# Altium PCB CH9343-安卓USB转串口板V0.0.1版本.PcbDoc
Units mil, origin at the board's own origin, x right, y up, seen from the top; angles counter-clockwise.
Board outline 1574.8 x 787.4 mil, 2 copper layers (Top Layer, Bottom Layer); 27 components, 20 nets, 88 pads, 23 vias.
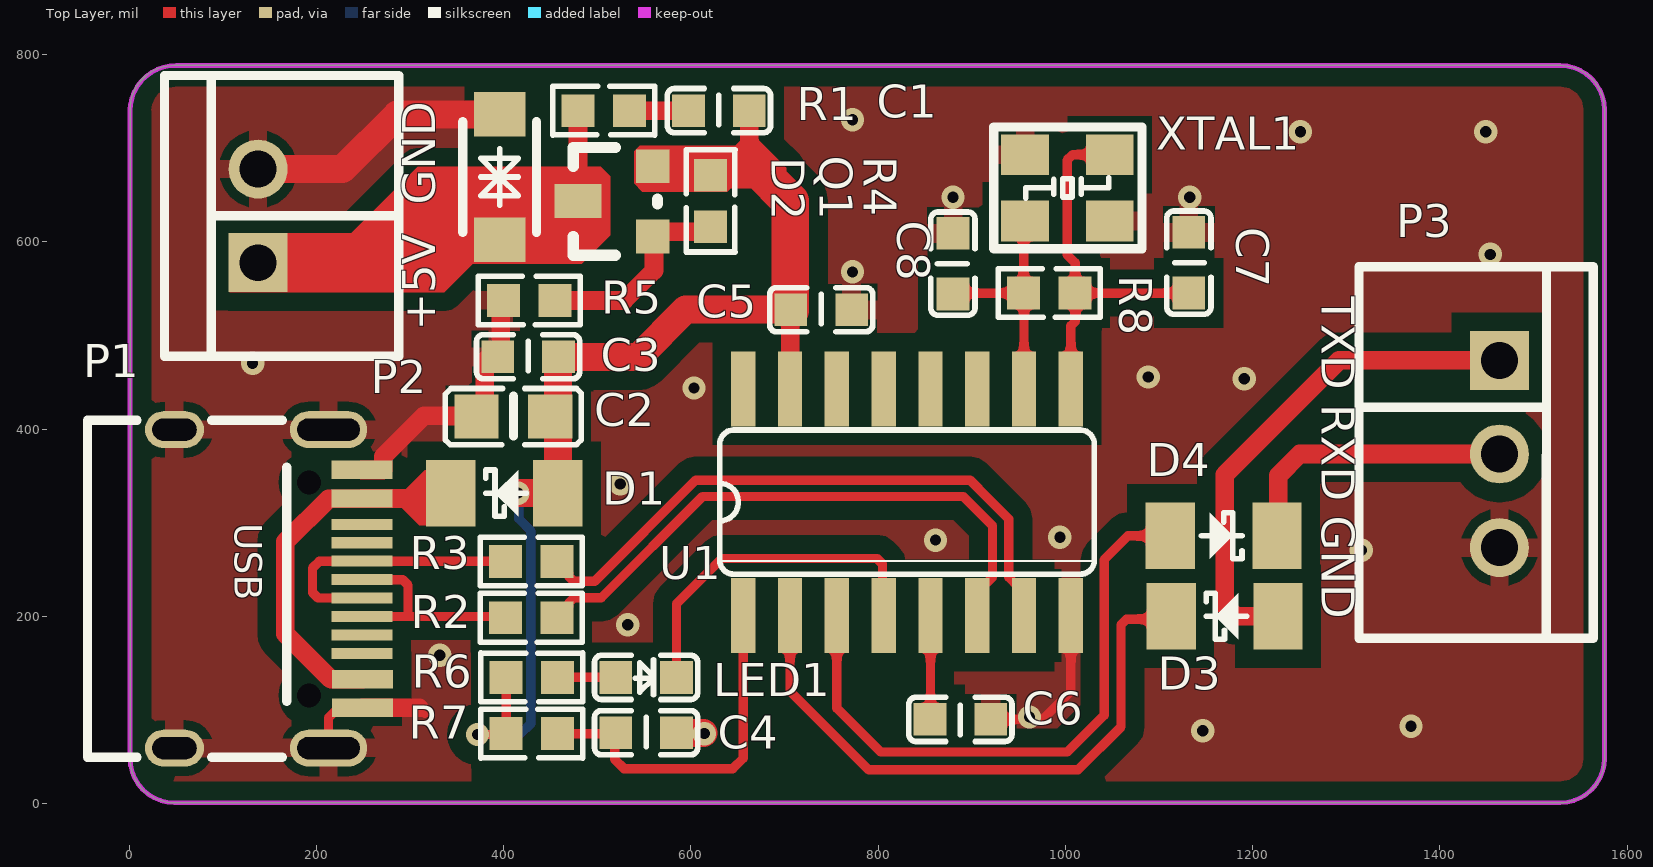
[diagram p0: Top Layer view]
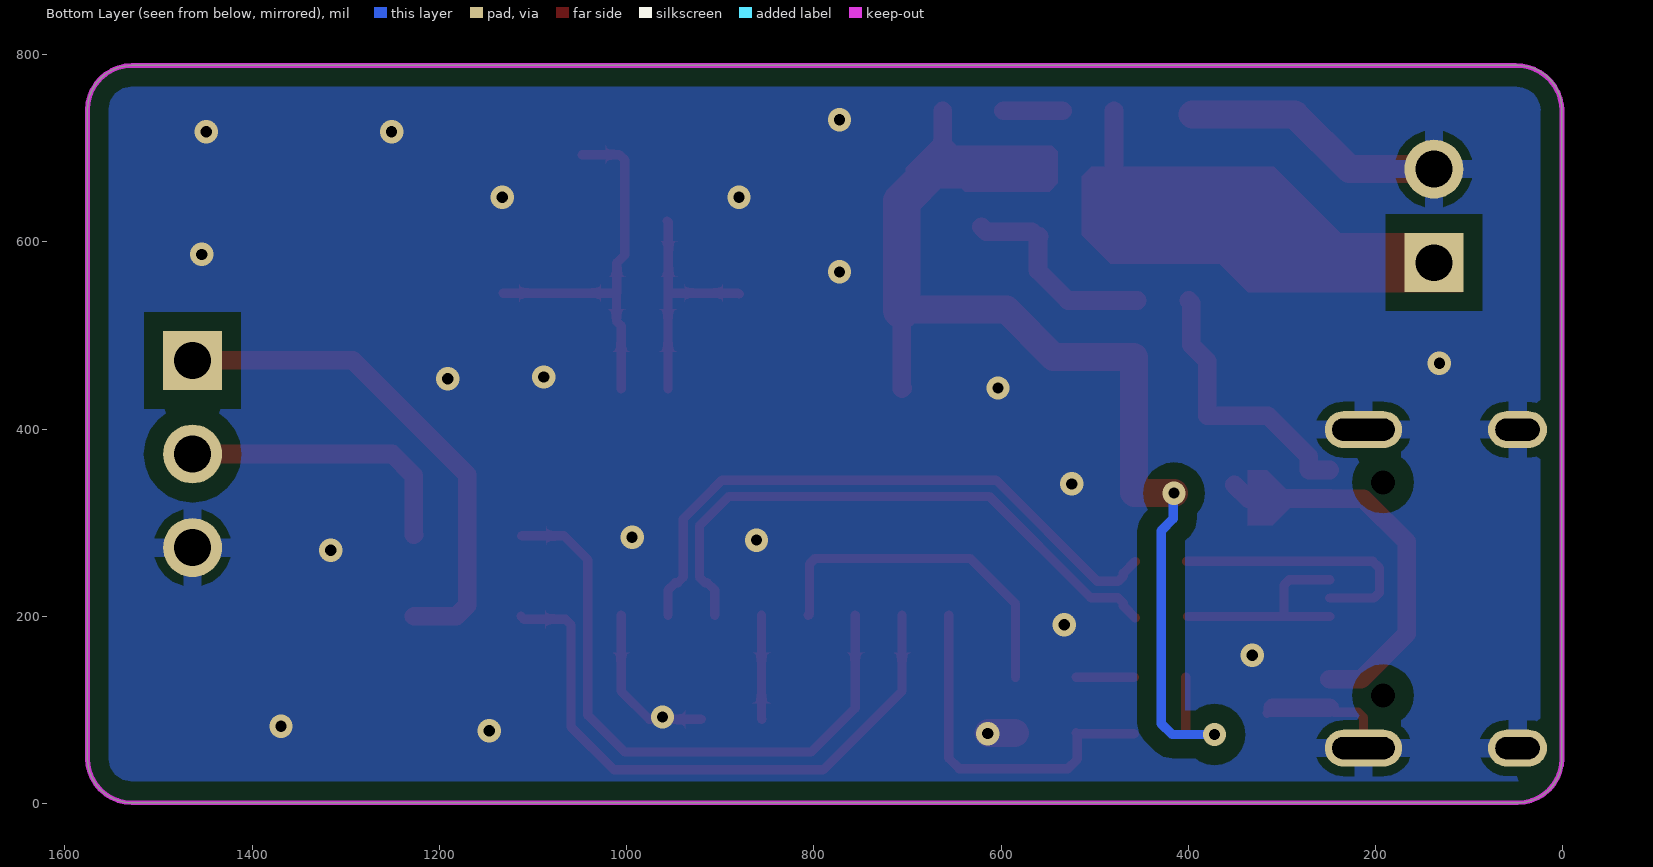
[diagram p1: Bottom Layer view, seen from below]

## Layer stack, top to bottom
Top Solder: solder mask 0.4, Solder Resist, Dk 3.5
Top Layer: signal copper 1.4
Dielectric 1: dielectric 12.6, FR-4, Dk 4.8
Bottom Layer: signal copper 1.4
Bottom Solder: solder mask 0.4, Solder Resist, Dk 3.5

## Board outline
0.98,48.23 0.98,741.14 cw(c48.23,741.14) 48.23,788.39 1528.54,788.39 cw(c1528.54,741.14) 1575.79,741.14 1575.79,48.23 cw(c1528.54,48.23) 1528.54,0.98 48.23,0.98 cw(c48.23,48.23)

## Design rules (kind name [scope] priority, off if disabled: settings)
Clearance Clearance_1 [InPolygon] p1: gap=20 ignorepadtopadclearanceinfootprint=FALSE
Clearance [All] p2: gap=4 ignorepadtopadclearanceinfootprint=FALSE
ComponentClearance [All] p1: gap=1 collisioncheckmode=3 verticalgap=1 showdistances=FALSE
DiffPairsRouting [All] p1: maxlimit=10 minlimit=7.5 mostfreqgap=10 toplayer_minwidth=10 toplayer_maxwidth=15 toplayer_prefwidth=15 bottomlayer_minwidth=10 bottomlayer_maxwidth=15 bottomlayer_prefwidth=15 maxuncoupledlength=500
MinimumSolderMaskSliver [All] p1: minsoldermaskwidth=1
PolygonConnect [All] p1: thpad.connectstyle=Relief thpad.reliefconductorwidth=20 thpad.reliefentries=4 thpad.polygonreliefangle="90 Angle" thpad.airgapwidth=10 smdpad.connectstyle=Relief smdpad.reliefconductorwidth=20 smdpad.reliefentries=4 smdpad.polygonreliefangle="90 Angle" smdpad.airgapwidth=10 via.connectstyle=Direct via.reliefconductorwidth=10 via.reliefentries=4 via.polygonreliefangle="90 Angle" via.airgapwidth=10
RoutingVias [All] p1: holewidth=28 width=50 viastyle="Through Hole" minholewidth=8 minwidth=12 maxholewidth=280 maxwidth=500
SilkToSilkClearance [All] p1: silktosilkclearance=1
SilkToSolderMaskClearance [IsPad] p1: minsilkscreentomaskgap=1 clearancetoexposedcopper=TRUE
SolderMaskExpansion [All] p1: expansion=4 istentingtop=FALSE
Width [All] p1: maxlimit=393.7 minlimit=10 preferedwidth=10
25 further rules are at their usual default settings.

## Classes and differential pairs
differential pair USB: +USB_P -USB_N

## Components (designator, comment, footprint, x,y, rotation, side; value= is the part's Value field where it differs from the comment)
C1 "100nF" C-0603 629.94,740.16 r0 top
C2 "10uF/25V" C-0805 410.43,413.39 r180 top
C3 "100nF" C-0603 426.16,477.36 r0 top
C4 "100nF" C-0603 552.18,75.79 r0 top
C5 "100nF" C-0603 739.19,527.56 r0 top
C6 "10nF" C-0603 887.84,90.05 r180 top
C7 "22pF" C-0603 1131.84,577.8 r270 top
C8 "22pF" C-0603 879.84,576.8 r90 top
D1 "DS22W" SOD-123F 400.59,331.69 r180 top
D2 "SMF6.5CA" DO-SOD-123FL_L2.8-W1.8-LS3.7-BI 395.67,669.29 r90 top
D3 "DS22W" SOD-123F 1169.93,200.05 r180 top
D4 "DS22W" SOD-123F 1168.93,286.05 r0 top
LED1 "LED-0603" LED-0603 552.18,134.84 r0 top
P1 "TYPEC" "Type c-16p" 148.81,229.43 r270 top locked
P2 "XH2.54-2P" XH2.54-2P 137.8,677.76 r270 top
P3 "HX2.54-3P" XH2.54-3P 1463.58,373.43 r90 top
Q1 "AO3401" SOT-23 559.33,605.7 r90 top
R1 "1K" R-0603 506.83,740.16 r180 top
R2 "0R" R-0603 429.39,198.59 r0 top
R3 "0R" R-0603 429.39,258.59 r0 top
R4 "10K" R-0603 621.06,643.7 r90 top
R5 "1K" R-0603 427.22,537.4 r0 top
R6 "1K" R-0603 430.12,134.84 r180 top
R7 "NC" R-0603 430.12,74.8 r180 top
R8 "1M" R-0603 982.84,545.3 r0 top
U1 "CH9343G" SO-16 830.84,322.05 r0 top
XTAL1 "24M" XTAL-3225 1002.12,657.73 r0 top

## Footprints (in the part's own frame and the unit in brackets; to place one, negate y for a bottom-side part, rotate by r counter-clockwise, add the part's x,y. Pads: shape width x height; smd on the part's side, far side on the other; paste and mask are expansions set on the pad)
C-0603 [mil]
  rect 35x35 smd: 1(-32.5,0) 2(32.5,0)
  silkscreen extent -55,-24 55,24
C-0805 [mm]
  rect 1.2x1.2 smd: 1(-1,0) 2(1,0)
  silkscreen extent -1.84,-0.76 1.84,0.76
DO-SOD-123FL_L2.8-W1.8-LS3.7-BI [mm]
  rect 1.2x1.4 smd: 1(-1.7,0) 2(1.7,0)
  silkscreen extent -1.5,-1 1.5,1
LED-0603 [mil] "LED-0603"
  rect 35x35 smd: 1(-32.5,0) 2(32.5,0)
  silkscreen extent -55,-24 55,24
R-0603 [mil]
  rect 35x35 smd: 1(-27.5,0) 2(27.5,0)
  silkscreen extent -54,-26 54,26
SO-16 [mil]
  rect 26x80 smd: 1(-175,-121) 2(-125,-121) 3(-75,-121) 4(-25,-121) 5(25,-121) 6(75,-121) 7(125,-121) 8(175,-121) 9(175,121) 10(125,121) 11(75,121) 12(25,121) 13(-25,121) 14(-75,121) 15(-125,121) 16(-175,121)
  silkscreen extent -200,-77 200,77
SOD-123F [mm]
  rect 1.34x1.8 smd: 1(-1.45,0) 2(1.45,0)
  silkscreen extent -0.6,-0.63 0.5,0.63
SOT-23 [mil]
  rect 36x36 smd: 1(0,0) 2(75,0)
  rect 36x50 smd: 3(38,80)
  silkscreen extent -20,-5 95,85
"Type c-16p" [mm]
  round 0 hole 0.65: 0(-2.89,1.1) 0(2.89,1.1)
  oval 1x2.1 hole 0.6 slot 1.7 at 90 deg: 1(-4.32,1.63) 4(4.32,1.63)
  oval 1x1.6 hole 0.6 slot 1.2 at 90 deg: 2(-4.32,-2.55) 3(4.32,-2.55)
  rect 0.3x1.65 smd: A5(-1.25,2.542) A6(-0.25,2.542) A7(0.25,2.542) A8(1.25,2.542) B5(1.75,2.542) B6(0.75,2.542) B7(-0.75,2.542) B8(-1.75,2.542)
  rect 0.5x1.65 smd: A9(2.45,2.55) A12(3.225,2.55) B9(-2.45,2.542) B12(-3.225,2.542)
  silkscreen extent -4.57,-4.91 4.57,0.5, body extent -4.47,-4.76 4.47,2.75, height 0.25
XH2.54-2P [mm]
  rect 1.6x1.6 hole 1: 1(2.54,0)
  round 1.6 hole 1: 2(0,0)
  silkscreen extent -2.54,-2.54 5.08,3.81
XH2.54-3P [mm]
  rect 1.6x1.6 hole 1: 1(2.54,0)
  round 1.6 hole 1: 2(0,0) 3(-2.54,0)
  silkscreen extent -5,-2.54 5.08,3.81
XTAL-3225 [mm] "XTAL-3225"
  rect 1.3x1.1 smd: 1(-1.15,-0.9) 2(1.15,-0.9) 3(1.15,0.9) 4(-1.15,0.9)
  silkscreen extent -2,-1.65 2.02,1.65

## Part data
C1: library part CAP_0603, "陶瓷电容，50V/X7R/10%"
C2: library part CAP_0805, "X5R/25V/10%"
C3 C4 C5 C6: library part CAP_0603, "X7R/50V/10%"
C7 C8: library part CAP_0603, "50V/COG/10%"
D1 D3 D4: library part D-SCHOTKY, "肖特基二极管"
D2: library part TVS, "双向瞬变二极管"
LED1: "发光二极管"
P1: library part "Type c 16p"
P2: "直针"
P3: library part XH2.54-3P, "XH2.54-3P 直针 座"
Q1: library part "MOSFET P", "P沟道"
R1 R4 R5 R8: library part R-0603, "5% ,1/10W"
R2 R3: library part R-0603
R6 R7: library part R-0603, "贴片电阻，5%"
U1: "安卓USB转串口，SO-16"
XTAL1: library part XTAL-3225, "贴片无源晶振"

## Via types
v1: diameter 25, hole 12, Top Layer to Bottom Layer, tented both sides, 23 vias

## Nets (pads, with @x,y where several pads share a name; then routed paths per layer and width w, separated by ;. In a path a pad name is that pad's centre, name@x,y a point inside that pad or via, vN(x,y) a via of type N, cw(c..) or ccw(c..) an arc to the next point about the centre after c; other vN are vias at no path point)
+5: C1.2 C2.1 C3.2 C5.1 D1.1 Q1.2 R4.2 R6.2 R7.2 U1.15 | length 1237.2
  Top Layer w10: v1(372.05,73.82) 401.63,73.82 R7.2 R6.2
  Top Layer w20: D1.1 D1.1@458.17,332.19 ; C3.2@458.17,476.87 C3.2 ; R4.2 664.37,671.2 662.44,673.13 662.44,679.13 ; C1.2 662.44,679.13 ; 670.3,679.13 662.44,679.13 ; C5.1@705.71,528.54 706.27,527.98 C5.1 ; U1.15 705.34,443.55 706.27,444.47 706.27,527.13 C5.1 ; C5.1@706.27,527.56 C5.1
  Top Layer w30: v1(415.35,331.69) D1.1 ; D1.1@458.17,332.19 458.17,414.37 458.17,476.87 543.8,476.87 594.49,527.56 C5.1@706.27,527.56
  Top Layer w40: 670.3,679.13 706.27,643.16 706.27,527.98 706.27,527.56 C5.1@706.27,527.13
  Bottom Layer w10: v1(372.05,73.82) 417.32,73.82 429.13,85.63 429.13,291.34 416.28,304.19 416.28,330.77 v1(415.35,331.69)
ACT: LED1.2 U1.4 | length 376.6
  Top Layer w10: LED1.2 584.68,213.62 632.87,261.81 798.86,261.81 804.72,255.95 804.72,202.17 U1.4
GND: C2.2 C3.1 C4.2 C5.2 C6.1 C7.1 C8.2 D2.2 P1.1 P1.2 P1.3 P1.4 P1.A12 P1.B12 P2.2 P3.3 R5.1 U1.8 XTAL1.2 XTAL1.4 | length 927.8
  Top Layer w10: P1.4 212.99,91.76 218.85,97.62 244.36,97.62 P1.A12 ; 309.94,102.46 315.94,96.46 ; C6.1 975.84,90.05 1005.84,120.05 U1.8
  Top Layer w20: P1.B12 271.21,356.4 271.37,356.55 271.37,370.78 314.96,414.37 379.92,414.37 379.92,472.8 397.03,489.9 397.03,534.7 R5.1 ; P1.A12 309.94,102.46 ; C4.2 C4.2@585.18,75.3 ; v1@613.68,75.3 v1(614.17,74.8)
  Top Layer w30: P2.2 227.95,677.76 286.42,736.22 D2.2 ; C4.2@585.18,75.3 v1@613.68,75.3
  other v1: 1146.65,77.76 1369.09,82.68 961.61,92.52 331.69,158.46 532.48,190.94 1315.94,270.67 861.22,281.5 994.09,284.45 524.61,341.54 603.35,443.9 1190.94,453.74 1088.58,455.71 131.89,470.47 772.64,567.91 1453.74,586.61 879.92,647.64 1132.87,647.64 1250.98,717.52 1448.82,717.52 772.64,730.31
NetC1_1: C1.1 R1.1 | length 63.1
  Top Layer w20: R1.1 C1.1
NetC6_2: C6.2 U1.5 | length 111.2
  Top Layer w10: C6.2 855.84,90.55 U1.5
NetC7_2: C7.2 R8.2 U1.9 XTAL1.3 | length 419.5
  Top Layer w10: U1.9 1005.84,510.3 1010.84,515.3 1010.84,544.8 R8.2 ; XTAL1.3 1007.7,693.17 1001.84,687.31 1001.84,586.3 1010.34,577.8 R8.2 ; C7.2 R8.2
NetC8_1: C8.1 R8.1 U1.10 XTAL1.1 | length 271.7
  Top Layer w10: C8.1 880.84,545.3 R8.1 ; U1.10 R8.1@955.84,560.55 ; R8.1@955.84,544.8 R8.1 ; XTAL1.1 955.34,620.8 R8.1
NetD3_1: D3.1 P3.1 | length 545.1
  Top Layer w20: D3.1 1181.99,200.05 1170.28,211.76 1170.28,351.38 1292.32,473.43 P3.1
NetD4_2: D4.2 P3.2 | length 310.7
  Top Layer w10: D4.2 D4.2@1227.02,287.05
  Top Layer w20: D4.2@1227.02,287.05 1227.36,287.39 1227.36,350.39 1250.39,373.43 P3.2
NetLED1_1: LED1.1 R6.1 | length 62.1
  Top Layer w10: R6.1 LED1.1
NetQ1_1: Q1.1 R4.1 R5.2 | length 221.3
  Top Layer w20: R5.2 528.54,537.4 560.56,569.42 Q1.1@560.56,604.47 ; Q1.1 Q1.1@560.56,604.47 ; R4.1 615.81,610.95 567.04,610.95 Q1.1@560.56,604.47
RST: C4.1 R7.1 U1.1 | length 388.4
  Top Layer w10: R7.1 C4.1@518.7,74.8 ; C4.1 C4.1@518.7,74.8 ; U1.1 655.84,48.56 644.68,37.4 528.54,37.4 518.7,47.24 C4.1@518.7,74.8
RXD: D4.1 U1.3 | length 667.4
  Top Layer w10: U1.3 755.84,102.05 802.77,55.12 1001.97,55.12 1041.34,94.49 1041.34,260.54 1066.84,286.05 D4.1
TXD: D3.2 U1.2 | length 654.6
  Top Layer w10: U1.2 705.84,120.05 789.77,36.12 1013.48,36.12 1059.34,81.98 1059.34,191.19 1065.2,197.05 1109.84,197.05 D3.2
USB_DM: P1.A7 P1.B7 R3.1 | length 290.8
  Top Layer w10: P1.A7 201.75,219.59 195.89,225.45 195.89,251.59 203.26,258.96 P1.B7 401.52,258.96 R3.1
USB_DP: P1.A6 P1.B6 R2.1 | length 236.6
  Top Layer w10: P1.B6 297.89,199.91 ; P1.A6 292.03,239.28 297.89,233.42 297.89,199.91 ; R2.1@400.57,199.91 297.89,199.91
USB_N: R3.2 U1.7 | length 666.3
  Top Layer w10: R3.2 469.39,246.09 469.39,243.2 475.25,237.34 497.04,237.34 605.25,345.55 898.09,345.55 918.22,325.42 928.9,314.73 939.59,304.05 939.59,241.91 945.45,236.05 947.84,236.05 955.84,228.05 U1.7
USB_P: R2.2 U1.6 | length 637.3
  Top Layer w10: R2.2 469.39,211.09 469.39,213.98 475.25,219.84 504.29,219.84 612.5,328.05 890.84,328.05 922.09,296.8 922.09,241.91 916.23,236.05 913.84,236.05 905.84,228.05 U1.6
VBUS: D1.2 P1.A9 P1.B9 | length 409.7
  Top Layer w20: P1.A9 215.51,132.97 166.89,181.59 166.89,279.59 213.03,325.73 248.73,325.73 P1.B9 336.19,325.89 D1.2@350.89,340.59
VIN: D2.1 P2.1 Q1.3 R1.2 | length 96.5
  Top Layer w20: Q1.3 R1.2
pads on no net: P1.0 P1.A5 P1.A8 P1.B5 P1.B8 U1.11 U1.12 U1.13 U1.14 U1.16

## Polygon pours and split planes (outlines as drawn)
GND on Bottom Layer "GND_L02_P001" (solid, remove dead copper, pour order 1): 48.23,0.98 cw(c48.23,48.23) 0.98,48.23 0.98,739.17 cw(c50.2,739.17) 50.2,788.39 1528.54,788.39 cw(c1528.54,741.14) 1575.79,741.14 1575.79,48.23 cw(c1528.54,48.23) 1528.54,0.98
GND on Top Layer "GND_L01_P002" (solid, remove dead copper, pour order 2): 48.23,0.98 cw(c48.23,48.23) 0.98,48.23 0.98,739.17 cw(c50.2,739.17) 50.2,788.39 1528.54,788.39 cw(c1528.54,741.14) 1575.79,741.14 1575.79,48.23 cw(c1528.54,48.23) 1528.54,0.98

## Keep-outs
Keep-Out Layer:
  lines w5: 0.98,48.23 ccw(c48.23,48.23) 48.23,0.98 1528.54,0.98 ccw(c1528.54,48.23) 1575.79,48.23 1575.79,741.14 ccw(c1528.54,741.14) 1528.54,788.39 50.2,788.39 ccw(c49.7,739.67) 0.98,740.16 0.98,48.23

## Other copper
Top Layer:
  pour cut-out: 365.12,41.95 365.16,41.91 365.16,17.72 393.7,17.72 394.68,18.7 394.68,42.32
  region net +5: 548.23,653.54 539.37,662.4 539.37,696.85 545.28,702.76 647.64,702.76 654.53,709.65 672.24,709.65 672.24,708.66 701.77,679.13 701.77,669.29 689.96,657.48 642.72,657.48 638.78,653.54
  region net VIN: 107.28,546.26 336.61,546.26 367.13,576.77 483.27,576.77 513.78,607.28 513.78,670.28 503.94,680.12 308.07,680.12 237.2,609.25 107.28,609.25
  region net VBUS: 288.39,328.74 315.94,356.3 336.61,356.3 336.61,298.23 337.6,297.24 310.04,297.24 288.39,318.9

## Silkscreen, mask and mechanical layers (free items; w line width, h text height)
Top Overlay:
  text "TXD RXD GND" at 1261.81,541.34 h60 r270
  text "+5V  GND" at 338.58,504.92 h60 r90
Mechanical 1:
  lines w5: 0.98,48.23 ccw(c48.23,48.23) 48.23,0.98 1528.54,0.98 ccw(c1528.54,48.23) 1575.79,48.23 1575.79,741.14 ccw(c1528.54,741.14) 1528.54,788.39 788.39,788.39 48.23,788.39 ccw(c48.23,741.14) 0.98,741.14 0.98,48.23
Drill Drawing:
  circle w10: c93.74,1914.64 r33.33
  lines w10: 60.4,1281.3 93.74,1297.97 127.07,1281.3 110.4,1314.64 127.07,1347.97 93.74,1331.3 60.4,1347.97 77.07,1314.64 60.4,1281.3 ; 60.4,1447.97 77.07,1447.97 93.74,1431.3 110.4,1447.97 127.07,1447.97 110.4,1464.64 127.07,1481.3 110.4,1481.3 93.74,1497.97 77.07,1481.3 60.4,1481.3 77.07,1464.64 60.4,1447.97 ; 60.4,1581.3 127.07,1581.3 127.07,1647.97 60.4,1647.97 60.4,1581.3 ; 60.4,1797.97 127.07,1797.97 93.74,1731.3 60.4,1797.97
  lines w15: 0.61,1236.3 11021.53,1236.3 ; 0.61,1986.3 11021.53,1986.3 ; 551.49,1086.3 551.49,2136.3 ; 1091.35,1086.3 1091.35,2136.3 ; 2191.03,1086.3 2191.03,2136.3 ; 2696.9,1086.3 2696.9,2136.3 ; 3430.7,1086.3 3430.7,2136.3 ; 4930.25,1086.3 4930.25,2136.3 ; 5520.1,1086.3 5520.1,2136.3 ; 6265.9,1086.3 6265.9,2136.3 ; 7455.55,1086.3 7455.55,2136.3 ; 8309.32,1086.3 8309.32,2136.3 ; 9642.92,1086.3 9642.92,2136.3 ; 0.61,1086.3 11021.53,1086.3 11021.53,2136.3 0.61,2136.3 0.61,1086.3
  text "Symbol" at 90.61,2031.3 h72
  text "Count" at 596.49,2031.3 h72
  text "Hole Size" at 1136.35,2031.3 h72
  text "Plated" at 2236.03,2031.3 h72
  text "Hole Type" at 2741.9,2031.3 h72
  text "Drill Layer Pair" at 3475.7,2031.3 h72
  text "Via/Pad" at 4975.25,2031.3 h72
  text "Pad Shape" at 5565.1,2031.3 h72
  text "Template" at 6310.9,2031.3 h72
  text "Description" at 7500.55,2031.3 h72
  text "Hole Tolerance (+)" at 8354.32,2031.3 h72
  text "Hole Tolerance (-)" at 9687.92,2031.3 h72
  text "2" at 596.49,1881.3 h60
  text "23.62mil (0.600mm)" at 1136.35,1881.3 h60
  text "PTH" at 2236.03,1881.3 h60
  text "Slot" at 2741.9,1881.3 h60
  text "Top Layer - Bottom Layer" at 3475.7,1881.3 h60
  text "Pad" at 4975.25,1881.3 h60
  text "Rounded" at 5565.1,1881.3 h60
  text "r100_160h60_120r100" at 6310.9,1881.3 h60
  text "2" at 596.49,1731.3 h60
  text "23.62mil (0.600mm)" at 1136.35,1731.3 h60
  text "PTH" at 2236.03,1731.3 h60
  text "Slot" at 2741.9,1731.3 h60
  text "Top Layer - Bottom Layer" at 3475.7,1731.3 h60
  text "Pad" at 4975.25,1731.3 h60
  text "Rounded" at 5565.1,1731.3 h60
  text "r100_210h60_170r100" at 6310.9,1731.3 h60
  text "2" at 596.49,1581.3 h60
  text "25.59mil (0.650mm)" at 1136.35,1581.3 h60
  text "PTH" at 2236.03,1581.3 h60
  text "Round" at 2741.9,1581.3 h60
  text "Top Layer - Bottom Layer" at 3475.7,1581.3 h60
  text "Pad" at 4975.25,1581.3 h60
  text "Rounded" at 5565.1,1581.3 h60
  text "c0h65" at 6310.9,1581.3 h60
  text "5" at 596.49,1431.3 h60
  text "39.37mil (1.000mm)" at 1136.35,1431.3 h60
  text "PTH" at 2236.03,1431.3 h60
  text "Round" at 2741.9,1431.3 h60
  text "Top Layer - Bottom Layer" at 3475.7,1431.3 h60
  text "Pad" at 4975.25,1431.3 h60
  text "(Mixed)" at 5565.1,1431.3 h60
  text "(Mixed)" at 6310.9,1431.3 h60
  text "23" at 596.49,1281.3 h60
  text "12.00mil (0.305mm)" at 1136.35,1281.3 h60
  text "PTH" at 2236.03,1281.3 h60
  text "Round" at 2741.9,1281.3 h60
  text "Top Layer - Bottom Layer" at 3475.7,1281.3 h60
  text "Via" at 4975.25,1281.3 h60
  text "Rounded" at 5565.1,1281.3 h60
  text "v64h30m0mx0" at 6310.9,1281.3 h60
  text "34 Total" at 596.49,1131.3 h60
  text "Slot definitions :" at 90.61,986.33 h60
  text "Routed Path Length" at 1123.3,986.33 h60
  text "= Calculated from tool start centre position to tool end centre position." at 2225.97,986.33 h60
  text "Hole Length" at 1123.3,886.36 h60
  text "= Routed Path Length + Tool Size = Slot length as defined in the PCB layout" at 1816.1,886.36 h60

## Text inside footprints (layer, text, board x,y; h text height)
P1: Top Overlay "USB" at 103.42,299.43 h50 r270